# EAGLE board moire (EAGLE 9.1.1)

Size 39.35 x 106.68 mm. Coordinates in mm from the lower left corner, seen from the top.
Outline: 0,0 39.35,0 39.35,106.68 0,106.68 0,0
Copper layers (1*16): Top 0.035559375mm / dielectric 1.6mm / Bottom 0.035559375mm
Design rules "oshpark-2layer": minimum track width 6mil, minimum drill 10mil, track to track 6mil, track to pad 6mil, pad to pad 6mil, via to via 6mil, smd to smd 6mil, copper to edge 15mil, drill to drill 6mil, minimum pad ring 5mil, minimum via ring 5mil, stop-mask expansion 2.5mil, vias tented up to drill 0mil, thermal gap 10mil

## Footprints (pad centres in the part's own frame; a part is rotated, then mirrored left to right if it is on the bottom)
C0402 = smd 0.65 x 0.75: 1 -0.6,0; 2 0.6,0
C1206 = smd 1.6 x 1.8: 1 -1.4,0; 2 1.4,0
C0603 = smd 1.1 x 1: 1 -0.85,0; 2 0.85,0
PANASONIC_B = smd 2.2 x 1.4: + 1.6,0; - -1.6,0
PANASONIC_A = smd 2 x 1.5: + 1.3,0; - -1.3,0
SOD123 = smd 1.4 x 1.4: A 1.9,0; C -1.9,0
TSSOP24_0635 = smd 0.33 x 1: 1 -3.493,-2.725; 2 -2.857,-2.725; 3 -2.223,-2.725; 4 -1.587,-2.725; 5 -0.953,-2.725; 6 -0.318,-2.725; 7 0.318,-2.725; 8 0.953,-2.725; 9 1.587,-2.725; 10 2.223,-2.725; 11 2.857,-2.725; 12 3.493,-2.725; 13 3.493,2.725; 14 2.857,2.725; 15 2.223,2.725; 16 1.587,2.725; 17 0.953,2.725; 18 0.318,2.725; 19 -0.318,2.725; 20 -0.953,2.725; 21 -1.587,2.725; 22 -2.223,2.725; 23 -2.857,2.725; 24 -3.493,2.725
SOT89 = smd 1 x 1.5: 1 -1.499,-1.981; 3 1.499,-1.981 | smd 1 x 2: 2 0,-1.727 | smd 2 x 2: 2@1 0,1.194
TSSOP16_065 = smd 0.35 x 1: 1 -1.95,-2.825; 2 -1.3,-2.825; 3 -0.65,-2.825; 4 0,-2.825; 5 0.65,-2.825; 6 1.3,-2.825; 7 1.95,-2.825; 8 2.6,-2.825; 9 2.6,2.825; 10 1.95,2.825; 11 1.3,2.825; 12 0.65,2.825; 13 0,2.825; 14 -0.65,2.825; 15 -1.3,2.825; 16 -1.95,2.825
DBZ_R-PDSO-G3 = smd 0.7 x 1: 1 -0.95,-1.1; 2 0.95,-1.1; 3 0,1.1
WE78 = drill 0.9 pad 1.93 octagon: 1 -2.54,0; 2 0,0; 3 2.54,0
WQP_PJ_301M6 = drill 1.016 pad 1.778 octagon: P1 0,-5.715; P2 0,-3.175; P3 0,4.445 | hole 2.2: 0,0
2X5-PTH = drill 1.016 pad 1.88 octagon: 1 -1.27,5.08; 2 1.27,5.08; 3 -1.27,2.54; 4 1.27,2.54; 5 -1.27,0; 6 1.27,0; 7 -1.27,-2.54; 8 1.27,-2.54; 9 -1.27,-5.08; 10 1.27,-5.08
1X04 = drill 1.016 pad 1.88 square: 1 0,0 | drill 1.016 pad 1.88: 2 2.54,0; 3 5.08,0; 4 7.62,0
0603 = smd 0.85 x 0.7: 1 -0.9,0; 2 0.7,0
L2012C = smd 0.9 x 1.25: 1 -0.9,0; 2 1,0
LED-BICOLOR-THROUGHHOLE-LUMEX = drill 0.7: A 0,0; GREEN_C 2.54,0; RED_C -2.54,0
CTS406 = smd 1.9 x 1.4: 1 -2.2,-1.2; 2 2.2,-1.2; 3 2.2,1.2; 4 -2.2,1.2
R0402 = smd 0.65 x 0.75: 1 -0.6,0; 2 0.6,0
ALPS_POT_VERTICAL_PS = drill 1 pad 1.88 square: P$1 -2.5,7; P$2 0,7; P$3 2.5,7 | drill 1.5 pad 2.54 octagon: P$4 -4.7,0; P$5 4.7,0
BOURNS_SLIDER = drill 1.1 octagon: 1 -15,1.25; 2 -15,3.75; 3 15,1.25; B 15,-3.75; DUMMY -15,-1.25; E -15,-3.75
R0603 = smd 1 x 1.1: 1 -0.85,0; 2 0.85,0
TACTILE-PTH = drill 1.016 pad 1.88: 1 -3.251,2.261; 2 3.251,2.261; 3 -3.251,-2.261; 4 3.251,-2.261
QFP80P900X900X160-32N = smd 1.5 x 0.55: 1 -4.2,2.8; 2 -4.2,2; 3 -4.2,1.2; 4 -4.2,0.4; 5 -4.2,-0.4; 6 -4.2,-1.2; 7 -4.2,-2; 8 -4.2,-2.8; 17 4.2,-2.8; 18 4.2,-2; 19 4.2,-1.2; 20 4.2,-0.4; 21 4.2,0.4; 22 4.2,1.2; 23 4.2,2; 24 4.2,2.8 | smd 0.55 x 1.5: 9 -2.8,-4.2; 10 -2,-4.2; 11 -1.2,-4.2; 12 -0.4,-4.2; 13 0.4,-4.2; 14 1.2,-4.2; 15 2,-4.2; 16 2.8,-4.2; 25 2.8,4.2; 26 2,4.2; 27 1.2,4.2; 28 0.4,4.2; 29 -0.4,4.2; 30 -1.2,4.2; 31 -2,4.2; 32 -2.8,4.2
SO14 = smd 0.6 x 2.2: 1 -3.81,-2.6; 2 -2.54,-2.6; 3 -1.27,-2.6; 4 0,-2.6; 5 1.27,-2.6; 6 2.54,-2.6; 7 3.81,-2.6; 8 3.81,2.6; 9 2.54,2.6; 10 1.27,2.6; 11 0,2.6; 12 -1.27,2.6; 13 -2.54,2.6; 14 -3.81,2.6
SO08 = smd 0.6 x 2.2: 1 -1.905,-2.6; 2 -0.635,-2.6; 3 0.635,-2.6; 4 1.905,-2.6; 5 1.905,2.6; 6 0.635,2.6; 7 -0.635,2.6; 8 -1.905,2.6

## Placement (x,y rotation side)
C1  100p  [C0402]  -79.5,-15.49 0 top  (outside the outline)
C2  100p  [C0402]  -85.09,-46.48 0 top  (outside the outline)
C3  100p  [C0402]  -85.09,-72.39 0 top  (outside the outline)
C4  100p  [C0402]  -85.09,-98.3 0 top  (outside the outline)
C5  100p  [C0402]  -85.09,-124.21 0 top  (outside the outline)
C6  100p  [C0402]  -85.09,-150.11 0 top  (outside the outline)
C7  22u  [C1206]  -73.66,-253.24 0 top  (outside the outline)
C8  100n  [C0402]  -85.09,-271.27 0 top  (outside the outline)
C9  100n  [C0402]  -85.09,-292.1 0 top  (outside the outline)
C10  100n  [C0402]  -79.5,-292.1 0 top  (outside the outline)
C11  22u  [C1206]  -74.42,-284.73 0 top  (outside the outline)
C13  1.0n  [C0402]  -16.51,88.9 0 top  (outside the outline)
C14  ESD  [C0603]  -59.69,83.82 0 top  (outside the outline)
C15  1.0n  [C0402]  -21.59,88.9 0 top  (outside the outline)
C16  ESD  [C0603]  -64.77,83.82 0 top  (outside the outline)
C17  100n  [C0402]  -75.95,-321.06 0 top  (outside the outline)
C18  100p  [C0402]  -78.74,72.39 0 top  (outside the outline)
C19  ESD  [C0603]  -69.85,83.82 0 top  (outside the outline)
C20  100p  [C0402]  -85.09,72.39 0 top  (outside the outline)
C21  ESD  [C0603]  -74.93,83.82 0 top  (outside the outline)
C23  100n  [C0402]  -79.5,-328.93 0 top  (outside the outline)
C24  100n  [C0402]  -73.91,-328.93 0 top  (outside the outline)
C30  100n  [C0402]  -79.5,-303.28 0 top  (outside the outline)
C33  100n  [C0402]  -85.09,-308.36 0 top  (outside the outline)
C34  20p  [C0402]  -36.83,88.9 0 top  (outside the outline)
C35  20p  [C0402]  -41.91,88.9 0 top  (outside the outline)
C36  100n  [C0402]  -17.78,78.74 0 top  (outside the outline)
C37  100n  [C0402]  -24.13,78.74 0 top  (outside the outline)
C38  100p  [C0402]  -30.48,78.74 0 top  (outside the outline)
C39  100n  [C0402]  -36.83,78.74 0 top  (outside the outline)
C40  1u  [C0402]  -46.99,88.9 0 top  (outside the outline)
C41  1.0n  [C0402]  -26.67,88.9 0 top  (outside the outline)
C42  1u  [C0402]  -52.07,88.9 0 top  (outside the outline)
C43  100n  [C0402]  -43.18,78.74 0 top  (outside the outline)
C44  1u  [C0402]  -57.15,88.9 0 top  (outside the outline)
C45  1u  [C0402]  -62.23,88.9 0 top  (outside the outline)
C46  22u  [PANASONIC_B]  -22.86,63.5 0 top  (outside the outline)
C47  22u  [PANASONIC_B]  -29.21,63.5 0 top  (outside the outline)
C48  10u  [PANASONIC_A]  -45.72,63.5 0 top  (outside the outline)
C49  100n  [C0402]  -49.53,78.74 0 top  (outside the outline)
C50  100n  [C0402]  -85.09,-334.01 0 top  (outside the outline)
C51  10u  [PANASONIC_A]  -50.8,63.5 0 top  (outside the outline)
C52  22u  [C1206]  -55.88,63.5 0 top  (outside the outline)
C53  22u  [C1206]  -60.96,63.5 0 top  (outside the outline)
C54  22u  [C1206]  -66.04,63.5 0 top  (outside the outline)
C58  ESD  [C0603]  -80.01,83.82 0 top  (outside the outline)
C59  ESD  [C0603]  -85.09,83.82 0 top  (outside the outline)
D3  1N5819HW  [SOD123]  -82.55,62.23 0 top  (outside the outline)
D4  1N5819HW  [SOD123]  -21.59,72.39 0 top  (outside the outline)
IC1  TLC59281DBQ  [TSSOP24_0635]  -80.77,-254.76 0 top  (outside the outline)
IC2  LD2981ABU33  [SOT89]  -45.72,43.18 0 top  (outside the outline)
IC3  4051PW  [TSSOP16_065]  -45.21,-246.38 0 top  (outside the outline)
IC5  LM4040B10  [DBZ_R-PDSO-G3]  -40.64,63.5 0 top  (outside the outline)
IC6  R-78E3.3-0.5  [WE78]  6.1,104.39 180 bottom
J1  PJ301_THONKICONN6  [WQP_PJ_301M6]  33.02,23.37 270 top
J2  PJ301_THONKICONN6  [WQP_PJ_301M6]  6.35,32.77 90 top
J3  PJ301_THONKICONN6  [WQP_PJ_301M6]  19.81,23.37 90 top
J4  PJ301_THONKICONN6  [WQP_PJ_301M6]  6.35,23.62 90 top
J5  PJ301_THONKICONN6  [WQP_PJ_301M6]  33.02,32.77 270 top
J6  PJ301_THONKICONN6  [WQP_PJ_301M6]  6.35,4.57 90 top
J7  PJ301_THONKICONN6  [WQP_PJ_301M6]  6.35,13.97 90 top
J8  PJ301_THONKICONN6  [WQP_PJ_301M6]  19.81,13.97 90 top
J9  PJ301_THONKICONN6  [WQP_PJ_301M6]  33.02,13.97 270 top
J10  PJ301_THONKICONN6  [WQP_PJ_301M6]  19.81,4.57 270 bottom
J11  PJ301_THONKICONN6  [WQP_PJ_301M6]  19.81,32.77 270 bottom
J12  PJ301_THONKICONN6  [WQP_PJ_301M6]  33.02,4.57 270 top
JP1  M05X2PTH  [2X5-PTH]  19.05,103.45 90 top
JP6  [1X04]  37.59,97.28 90 top
L2  [0603]  -74.42,-270 0 top  (outside the outline)
L4  [0603]  -55.88,93.98 0 top  (outside the outline)
L6  [0603]  -59.69,93.98 0 top  (outside the outline)
L7  33u  [L2012C]  -71.12,63.5 0 top  (outside the outline)
L8  [0603]  -63.5,93.98 0 top  (outside the outline)
LED7  SSL-LX3059IGW-CA  [LED-BICOLOR-THROUGHHOLE-LUMEX]  -83.31,-260.1 0 top  (outside the outline)
LED8  SSL-LX3059IGW-CA  [LED-BICOLOR-THROUGHHOLE-LUMEX]  -76.96,-260.1 0 top  (outside the outline)
LED9  SSL-LX3059IGW-CA  [LED-BICOLOR-THROUGHHOLE-LUMEX]  -70.61,-260.1 0 top  (outside the outline)
LED10  SSL-LX3059IGW-CA  [LED-BICOLOR-THROUGHHOLE-LUMEX]  -83.31,-265.43 0 top  (outside the outline)
LED11  SSL-LX3059IGW-CA  [LED-BICOLOR-THROUGHHOLE-LUMEX]  -76.96,-265.43 0 top  (outside the outline)
LED12  SSL-LX3059IGW-CA  [LED-BICOLOR-THROUGHHOLE-LUMEX]  -70.61,-265.43 0 top  (outside the outline)
Q2  8MHz  [CTS406]  -16.51,64.77 0 top  (outside the outline)
R1  100k  [R0402]  -55.88,78.74 0 top  (outside the outline)
R2  33k  [R0402]  -46.99,93.98 0 top  (outside the outline)
R3  200k  [R0402]  -62.23,78.74 0 top  (outside the outline)
R4  10kB  [ALPS_POT_VERTICAL_PS]  19.56,80.01 0 top
R5  10kB  [ALPS_POT_VERTICAL_PS]  6.35,80.01 0 top
R6  10kB  [ALPS_POT_VERTICAL_PS]  32.77,80.01 0 top
R7  100k  [R0402]  -68.58,78.74 0 top  (outside the outline)
R8  33k  [R0402]  -52.07,93.98 0 top  (outside the outline)
R9  200k  [R0402]  -74.93,78.74 0 top  (outside the outline)
R10  100k  [R0402]  -81.28,78.74 0 top  (outside the outline)
R11  56k  [R0402]  -41.91,93.98 0 top  (outside the outline)
R12  200k  [R0402]  -16.51,83.82 0 top  (outside the outline)
R13  100k  [R0402]  -22.86,83.82 0 top  (outside the outline)
R14  100k  [R0402]  -29.21,83.82 0 top  (outside the outline)
R15  56k  [R0402]  -67.31,88.9 0 top  (outside the outline)
R16  200k  [R0402]  -35.56,83.82 0 top  (outside the outline)
R17  56k  [R0402]  -72.39,88.9 0 top  (outside the outline)
R18  10k  [R0402]  -77.47,88.9 0 top  (outside the outline)
R19  15k  [R0402]  -82.55,88.9 0 top  (outside the outline)
R20  33k  [R0402]  -16.51,93.98 0 top  (outside the outline)
R21  100  [R0402]  -21.59,93.98 0 top  (outside the outline)
R22  100  [R0402]  -26.67,93.98 0 top  (outside the outline)
R23  2.2k  [R0402]  -31.75,88.9 0 top  (outside the outline)
R24  100k  [R0402]  -41.91,83.82 0 top  (outside the outline)
R25  200k  [R0402]  -48.26,83.82 0 top  (outside the outline)
R26  20kB  [BOURNS_SLIDER]  33.02,56.13 90 top
R27  200k  [R0402]  -54.61,83.82 0 top  (outside the outline)
R28  20kB  [BOURNS_SLIDER]  6.35,56.13 90 top
R29  20kB  [BOURNS_SLIDER]  19.56,56.13 90 top
R30  15k  [R0402]  -31.75,93.98 0 top  (outside the outline)
R31  15k  [R0402]  -36.83,93.98 0 top  (outside the outline)
R32  1.0k  [R0603]  -79.5,-46.48 0 top  (outside the outline)
R33  130k  [R0402]  -75.95,-38.61 0 top  (outside the outline)
R34  20k  [R0402]  -74.68,-46.48 0 top  (outside the outline)
R35  1.0k  [R0603]  -73.91,-15.49 0 top  (outside the outline)
R36  1.0k  [R0603]  -79.5,-72.39 0 top  (outside the outline)
R37  130k  [R0402]  -75.95,-64.52 0 top  (outside the outline)
R38  20k  [R0402]  -74.68,-72.39 0 top  (outside the outline)
R39  1.0k  [R0603]  -79.5,-98.3 0 top  (outside the outline)
R40  130k  [R0402]  -75.95,-90.42 0 top  (outside the outline)
R41  130k  [R0402]  -85.09,-15.49 0 top  (outside the outline)
R42  20k  [R0402]  -74.68,-98.3 0 top  (outside the outline)
R43  1.0k  [R0603]  -79.5,-124.21 0 top  (outside the outline)
R44  130k  [R0402]  -75.95,-116.33 0 top  (outside the outline)
R45  20k  [R0402]  -74.68,-124.21 0 top  (outside the outline)
R46  1.0k  [R0603]  -79.5,-150.11 0 top  (outside the outline)
R47  20k  [R0402]  -80.26,-20.57 0 top  (outside the outline)
R48  130k  [R0402]  -75.95,-142.24 0 top  (outside the outline)
R49  20k  [R0402]  -74.68,-150.11 0 top  (outside the outline)
R50  10k  [R0402]  -79.5,-271.27 0 top  (outside the outline)
SW1  [TACTILE-PTH]  6.35,92.46 0 top
SW2  [TACTILE-PTH]  19.05,92.46 0 top
SW3  [TACTILE-PTH]  32.77,92.46 0 top
U1  STM32F303K8T6  [QFP80P900X900X160-32N]  -45.72,7.62 0 top  (outside the outline)
U2  MCP6004_SMD  [SO14]  -29.21,3.81 0 top  (outside the outline)
U3  MCP6002_  [SO08]  -17.78,41.91 0 top  (outside the outline)
U4  TL074_SMD  [SO14]  -80.01,-157.73 0 top  (outside the outline)
U5  TL072_SMD  [SO08]  -1.91,-182.49 0 top  (outside the outline)

## Library data of the parts
C1-C11 C13-C21 C23 C24 C30 C33-C54 C58 C59 R1-R3 R7-R25 R27 R30-R50 = rcl
D3 D4 = diode
IC1 IC3 = og-ics
IC2 IC6 = og-vreg
IC5 = texas
J1-J12 = og-pj301_variations
JP1 = og-header
JP6 SW1-SW3 = SparkFun
L2 L4 L6 L8 = wuerth-elektronik
L7 = og-rcl
LED7-LED12 = og-leds
Q2 = og-crystal
R4-R6 R26 R28 R29 = og-pots
U1 = STM32F303K8T6; AVAILABILITY: Unavailable; DESCRIPTION: Analog and DSP with FPU ARM Cortex-M4 MCU with 64 Kbytes Flash, 72 MHz CPU, CCM, 12-bit ADC 5 MSPS, comparators, op-amp; MF: STMicroelectronics; MP: STM32F303K8T6; PACKAGE: LQFP-32 STMicroelectronics; PRICE: None
U2-U5 = MusicThingModular

## Nets
+3V3: C37.1 C39.1 C40.1 C42.1 C49.1 C51.+ IC6.3 L2.2 LED7.A LED8.A LED9.A LED10.A LED11.A LED12.A R18.1 R26.B R28.B R29.B U1.1 U1.17
+3V3_A: C9.1 C10.1 C11.1 C30.1 C33.1 C43.1 C44.1 C48.+ IC2.1 IC3.16 R4.P$1 R5.P$1 R6.P$1 R26.3 R28.3 R29.3 U1.5 U2.4 U3.8
A_ADC: R47.2 U1.10
A_CV: C41.2 R20.1 U1.6 U2.1
A_GATE: R42.2 U1.20
A_TRIG: C38.2 R17.1 U1.25 U2.14
ADC_TIME_SHAPE: IC3.3 U1.9
AREF_-10: C45.1 IC5.2 R3.2 R9.2 R12.2 R16.2 R23.2 R25.2 R27.2
B_ADC: R34.2 U1.11
B_CV: C13.2 R2.1 U1.7 U2.7
B_GATE: R45.2 U1.21
B_TRIG: C18.2 R11.1 U1.14 U3.1
C_ADC: R38.2 U1.12
C_CV: C15.2 R8.1 U1.8 U2.8
C_GATE: R49.2 U1.22
C_TRIG: C20.2 R15.1 U1.15 U3.7
GATE_IN1: C59.1 J6.P3 R24.2
GATE_IN2: C19.1 J3.P3 R10.2
GATE_IN3: C21.1 J4.P3 R14.2
GND: C7.2 C8.2 C9.2 C10.2 C11.2 C14.2 C16.2 C19.2 C21.2 C30.2 C33.2 C34.1 C35.1 C36.2 C37.2 C39.2 C40.2 C42.2 C43.2 C44.2 C45.2 C46.- C47.+ C48.- C49.2 C51.- C52.2 C53.2 C54.2 C58.2 C59.2 IC1.1 IC1.21 IC2.2 IC3.6 IC3.7 IC3.8 IC5.1 IC6.2 J1.P1 J1.P2 J2.P1 J2.P2 J3.P1 J3.P2 J4.P1 J4.P2 J5.P1 J5.P2 J6.P1 J6.P2 J7.P1 J8.P1 J9.P1 J10.P1 J11.P1 J12.P1 JP1.3 JP1.4 JP1.5 JP1.6 JP1.7 JP1.8 JP6.1 Q2.2 Q2.4 R4.P$3 R5.P$3 R6.P$3 R26.1 R28.1 R29.1 R50.2 SW1.1 SW1.2 SW2.1 SW2.2 SW3.1 SW3.2 U1.16 U1.31 U1.32 U2.2 U2.6 U2.9 U2.11 U2.13 U3.2 U3.4 U3.6
HARMONICS_IN: C58.1 J5.P3 R13.2
HARMONICS_IN1: C14.1 J1.P3 R1.2
HARMONICS_IN2: C16.1 J2.P3 R7.2
LEDS_SCK: IC1.3 U1.26
LEDS_SIN: IC1.2 U1.28
N$1: R29.E R31.1
N$2: C13.1 R1.1 R2.2 R3.1 U2.5
N$3: C15.1 R7.1 R8.2 R9.1 U2.10
N$4: C18.1 R10.1 R11.2 R12.1 U3.3
N$5: C38.1 R17.2 R24.1 R25.1 U2.12
N$6: C20.1 R14.1 R15.2 R16.1 U3.5
N$7: J8.P3 R32.1 R33.1
N$8: C2.1 R33.2 R34.1 U4.5
N$9: R21.1 U1.2
N$10: R22.1 U1.3
N$11: C35.2 Q2.3 R21.2
N$12: C34.2 Q2.1 R22.2
N$13: D3.A JP1.9 JP1.10
N$14: D4.C JP1.1 JP1.2
N$15: C53.1 IC6.1 L7.2
N$16: D4.A L6.2
N$17: C52.1 D3.C L4.2 L7.1 L8.2
N$18: C54.1 IC2.3 L8.1
N$19: C2.2 R32.2 U4.7
N$20: J9.P3 R36.1 R37.1
N$21: C3.1 R37.2 R38.1 U4.10
N$22: C3.2 R36.2 U4.8
N$23: J10.P3 R39.1 R40.1
N$24: C4.1 R40.2 R42.1 U4.12
N$25: C4.2 R39.2 U4.14
N$26: J11.P3 R43.1 R44.1
N$27: C5.1 R44.2 R45.1 U5.3
N$28: C5.2 R43.2 U5.1
N$29: J12.P3 R46.1 R48.1
N$30: C6.1 R48.2 R49.1 U5.5
N$31: C6.2 R46.2 U5.7
N$32: IC1.11 LED8.GREEN_C
N$33: IC1.10 LED7.RED_C
N$34: IC1.12 LED8.RED_C
N$35: IC1.7 LED9.RED_C
N$36: IC1.8 LED9.GREEN_C
N$37: IC1.15 LED11.RED_C
N$38: IC1.16 LED11.GREEN_C
N$39: IC1.13 LED10.GREEN_C
N$40: IC1.17 LED12.RED_C
N$41: C41.1 R13.1 R20.2 R27.1 U2.3
N$42: IC1.18 LED12.GREEN_C
N$43: IC1.14 LED10.RED_C
N$44: C7.1 C8.1 IC1.24 L2.1
N$45: IC1.19 R19.2
N$46: IC1.20 R30.2
N$47: IC1.6 R31.2
N$48: IC3.1 R26.2
N$49: R28.E R30.1
N$50: R19.1 R26.E
N$51: IC3.2 R5.P$2
N$52: C17.2 C23.1 C24.1 C50.2
N$53: IC3.12 R4.P$2
N$54: IC3.13 R6.P$2
N$55: IC3.14 R29.2
N$56: IC3.15 R28.2
N$68: IC1.23 R50.1
N$86: J7.P3 R35.1 R41.1
N$87: C1.1 R41.2 R47.1 U4.3
N$93: C1.2 R35.2 U4.1
N$101: IC1.9 LED7.GREEN_C
POTS_ADDR_A: IC3.11 U1.13
POTS_ADDR_B: IC3.10 U1.18
POTS_ADDR_C: IC3.9 U1.19
RESET: C36.1 JP6.4 R18.2 U1.4
SW_MODE_A: SW1.3 SW1.4 U1.27
SW_MODE_B: SW2.3 SW2.4 U1.29
SW_MODE_C: SW3.3 SW3.4 U1.30
SWCLK: JP6.3 U1.24
SWDIO: JP6.2 U1.23
VCC: C17.1 C46.+ C50.1 L4.1 U4.4 U5.8
VEE: C23.2 C24.2 C47.- L6.1 R23.1 U4.11 U5.4
VREF_BIAS: U4.2 U4.6 U4.9 U4.13 U5.2 U5.6

## Tracks (layer width: path | path; a pad name or v marks a point on that pad's centre or on a via)
+3V3  (19 unrouted)
+3V3_A  (18 unrouted)
A_ADC  (1 unrouted)
A_CV  (3 unrouted)
A_GATE  (1 unrouted)
A_TRIG  (3 unrouted)
ADC_TIME_SHAPE  (1 unrouted)
AREF_-10  (8 unrouted)
B_ADC  (1 unrouted)
B_CV  (3 unrouted)
B_GATE  (1 unrouted)
B_TRIG  (3 unrouted)
C_ADC  (1 unrouted)
C_CV  (3 unrouted)
C_GATE  (1 unrouted)
C_TRIG  (3 unrouted)
GATE_IN1  (2 unrouted)
GATE_IN2  (2 unrouted)
GATE_IN3  (2 unrouted)
GND  (89 unrouted)
HARMONICS_IN  (2 unrouted)
HARMONICS_IN1  (2 unrouted)
HARMONICS_IN2  (2 unrouted)
LEDS_SCK  (1 unrouted)
LEDS_SIN  (1 unrouted)
N$1  (1 unrouted)
N$2  (4 unrouted)
N$3  (4 unrouted)
N$4  (4 unrouted)
N$5  (4 unrouted)
N$6  (4 unrouted)
N$7  (2 unrouted)
N$8  (3 unrouted)
N$9  (1 unrouted)
N$10  (1 unrouted)
N$11  (2 unrouted)
N$12  (2 unrouted)
N$13  (2 unrouted)
N$14  (2 unrouted)
N$15  (2 unrouted)
N$16  (1 unrouted)
N$17  (4 unrouted)
N$18  (2 unrouted)
N$19  (2 unrouted)
N$20  (2 unrouted)
N$21  (3 unrouted)
N$22  (2 unrouted)
N$23  (2 unrouted)
N$24  (3 unrouted)
N$25  (2 unrouted)
N$26  (2 unrouted)
N$27  (3 unrouted)
N$28  (2 unrouted)
N$29  (2 unrouted)
N$30  (3 unrouted)
N$31  (2 unrouted)
N$32  (1 unrouted)
N$33  (1 unrouted)
N$34  (1 unrouted)
N$35  (1 unrouted)
N$36  (1 unrouted)
N$37  (1 unrouted)
N$38  (1 unrouted)
N$39  (1 unrouted)
N$40  (1 unrouted)
N$41  (4 unrouted)
N$42  (1 unrouted)
N$43  (1 unrouted)
N$44  (3 unrouted)
N$45  (1 unrouted)
N$46  (1 unrouted)
N$47  (1 unrouted)
N$48  (1 unrouted)
N$49  (1 unrouted)
N$50  (1 unrouted)
N$51  (1 unrouted)
N$52  (3 unrouted)
N$53  (1 unrouted)
N$54  (1 unrouted)
N$55  (1 unrouted)
N$56  (1 unrouted)
N$68  (1 unrouted)
N$86  (2 unrouted)
N$87  (3 unrouted)
N$93  (2 unrouted)
N$101  (1 unrouted)
POTS_ADDR_A  (1 unrouted)
POTS_ADDR_B  (1 unrouted)
POTS_ADDR_C  (1 unrouted)
RESET  (3 unrouted)
SW_MODE_A  (2 unrouted)
SW_MODE_B  (2 unrouted)
SW_MODE_C  (2 unrouted)
SWCLK  (1 unrouted)
SWDIO  (1 unrouted)
VCC  (5 unrouted)
VEE  (6 unrouted)
VREF_BIAS  (5 unrouted)